# Altium PCB fan_control.PcbDoc
Units mm, origin at the board's own origin, x right, y up, seen from the top; angles counter-clockwise.
Board outline 23.5 x 12 mm, 2 copper layers (Top Layer, Bottom Layer); 21 components, 13 nets, 59 pads, 7 vias.
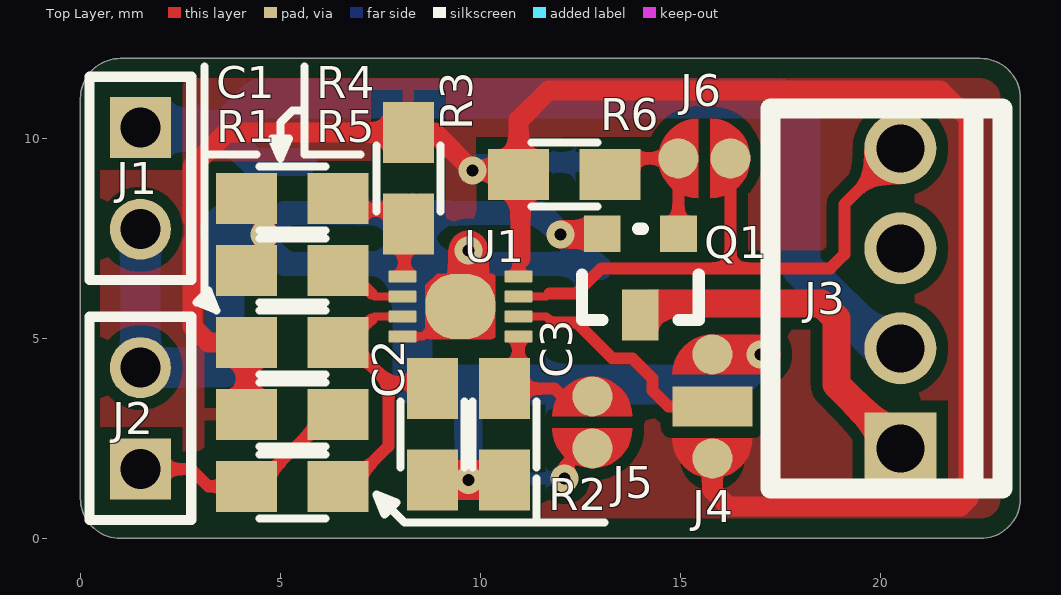
[diagram p0: Top Layer view]
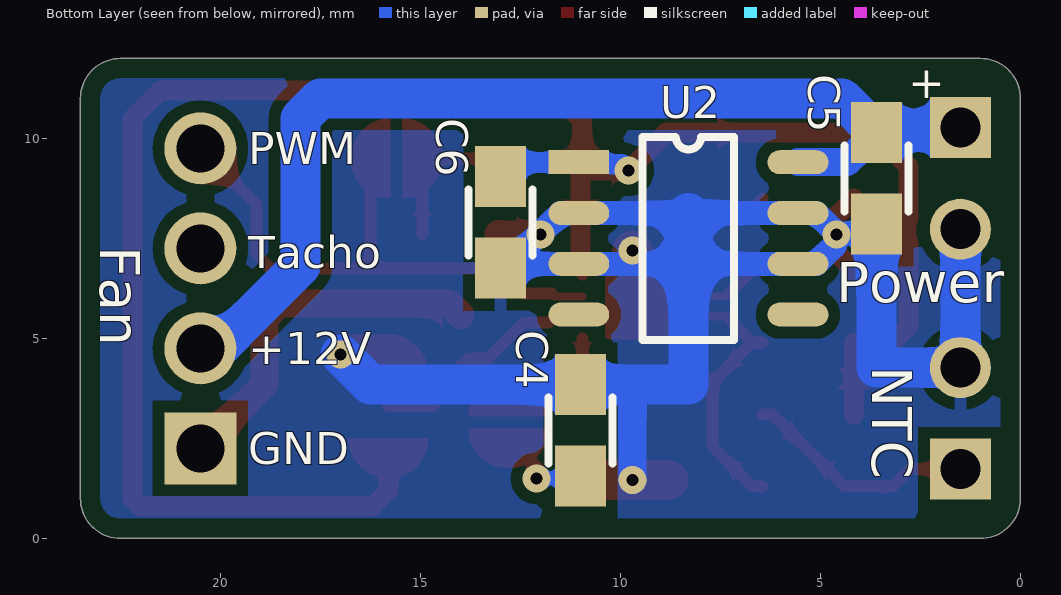
[diagram p1: Bottom Layer view, seen from below]

## Layer stack, top to bottom
Top Solder: solder mask 0.0102, Solder Resist, Dk 3.5
Top Layer: signal copper 0.0356
Dielectric 1: dielectric 0.32, FR-4, Dk 4.8
Bottom Layer: signal copper 0.0356
Bottom Solder: solder mask 0.0102, Solder Resist, Dk 3.5

## Board outline
0,1 0,11 cw(c1,11) 1,12 22.5,12 cw(c22.5,11) 23.5,11 23.5,1 cw(c22.5,1) 22.5,0 1,0 cw(c1,1)

## Design rules (kind name [scope] priority, off if disabled: settings)
Clearance [All] p1: gap=0.3 ignorepadtopadclearanceinfootprint=FALSE except(0: Arc-Hole Track-Hole SMDPad-Hole THPad-Hole Via-Hole Fill-Hole Poly-Hole Region-Hole Text-Hole; 0.2: SMDPad-SMDPad SMDPad-Region; 0.25: Arc-SMDPad Track-SMDPad)
MinimumAnnularRing [All] p1: minimumring=0.2
MinimumSolderMaskSliver [All] p1: minsoldermaskwidth=0.1
PolygonConnect [All] p1: thpad.connectstyle=Relief thpad.reliefconductorwidth=0.3 thpad.reliefentries=4 thpad.polygonreliefangle="90 Angle" thpad.airgapwidth=0.3 smdpad.connectstyle=Relief smdpad.reliefconductorwidth=0.3 smdpad.reliefentries=4 smdpad.polygonreliefangle="90 Angle" smdpad.airgapwidth=0.3 via.connectstyle=Direct via.reliefconductorwidth=0.254 via.reliefentries=4 via.polygonreliefangle="90 Angle" via.airgapwidth=0.254
RoutingVias [All] p1: holewidth=0.3 width=0.7 viastyle="Through Hole" minholewidth=0.3 minwidth=0.6 maxholewidth=5 maxwidth=5
SilkToSilkClearance [All] p1: silktosilkclearance=0.1
SilkToSolderMaskClearance [IsPad] p1: minsilkscreentomaskgap=0.05 clearancetoexposedcopper=TRUE
SolderMaskExpansion [All] p1: expansion=0.05
Width [All] p1: maxlimit=5 minlimit=0.2 preferedwidth=0.3 minimp=50.000000 maximp=50.000000 favimp=50.000000
27 further rules are at their usual default settings.

## Components (designator, comment, footprint, x,y, rotation, side; value= is the part's Value field where it differs from the comment)
C1 "NB" C_0805_S 5.3,4.9 r0 top
C2 "NB" C_0805_S 8.8,2.6 r270 top
C3 "470p" C_0805_S 10.6,2.6 r270 top
C4 "330n" C_0805_S 11,2.7 r90 bottom
C5 "330n" C_0805_S 3.6,9 r270 bottom
C6 "100n" C_0805_S 13,7.9 r270 bottom
J1 "Supply" HEADER_2_RM_2.54 1.5,9 r270 top
J2 "Sensor" HEADER_2_RM_2.54 1.5,3 r90 top
J3 "Fan 4 Lead" CON_1X4_RM2.5_MOLEX_MINI_LATCH 20.5,6 r270 top
J4 "D0" SOLDER_JUMPER_3PIN_0.3MM 15.8,3.3 r90 top
J5 "Freq" Solder_Jumper_2pin_0.3mm 12.8,2.9 r270 top
J6 "PWM" Solder_Jumper_2pin_0.3mm 15.6,9.5 r0 top
Q1 "PMV60ENEA" SOT-23 14,6.6 r180 top
R1 "8.2k" R_0805_S 5.3,3.1 r0 top
R2 "0" R_0805_S 5.3,1.3 r0 top
R3 "NB" R_0805_S 8.2,9 r90 top
R4 "0" R_0805_S 5.3,8.5 r0 top
R5 "6.2k" R_0805_S 5.3,6.7 r0 top
R6 "10k" R_0805_S 12.1,9.1 r180 top
U1 "MAX31740ATA+" "TDFN-8 0.5mm" 9.5,5.8 r0 top
U2 "L78L05ABD13TR" SOIC8 8.3,7.5 r180 bottom

## Footprints (in the part's own frame and the unit in brackets; to place one, negate y for a bottom-side part, rotate by r counter-clockwise, add the part's x,y. Pads: shape width x height; smd on the part's side, far side on the other; paste and mask are expansions set on the pad)
C_0805_S [mil]
  rect 60x50 smd: 1(-45,0) 2(45,0)
  silkscreen extent -32,-31 32,31, body extent -40,-25 40,25, height 51
CON_1X4_RM2.5_MOLEX_MINI_LATCH [mm] "Molex Mini Latch 2.5 Header with lock"
  rect 1.8x1.8 hole 1.2: 1(3.75,0)
  round 1.8 hole 1.2: 2(1.25,0) 3(-1.25,0) 4(-3.75,0)
  silkscreen extent -4.75,-3.25 4.75,2.55, body extent -5.23,-3.25 4.75,2.55, height 11.55
HEADER_2_RM_2.54 [mil] "Header 2 Pin 2.54mm"
  rect 60x60 hole 39.37: 1(-50,0)
  round 60 hole 39.37: 2(50,0)
  silkscreen extent -100,-50 100,50, body extent -100,-50 100,50, height 394
R_0805_S [mil]
  rect 60x50 smd: 1(-45,0) 2(45,0)
  silkscreen extent -32,-31 32,31, body extent -40,-26 40,26, height 49
SOIC8 [mm]
  rect 1.52x0.6 smd: 1(-2.74,1.905)
  oval 1.52x0.6 smd: 2(-2.74,0.635) 3(-2.74,-0.635) 4(-2.74,-1.905) 5(2.74,-1.905) 6(2.74,-0.635) 7(2.74,0.635) 8(2.74,1.905)
  silkscreen extent -1.15,-2.54 1.15,2.54, body extent -3,-2.45 3,2.45, height 1.7
Solder_Jumper_2pin_0.3mm [mm] "Solder jumper with two pins with a spacing of 0.3mm"
  round 1 smd: 1(-0.65,0) 2(0.65,0)
  Top Layer region: 0.15,-1 0.533,-0.924 0.857,-0.707 1.074,-0.383 1.15,0 1.15,0 1.074,0.383 0.857,0.707 0.533,0.924 0.15,1 0.15,1
  Top Layer region: -0.15,1 -0.533,0.924 -0.857,0.707 -1.074,0.383 -1.15,0 -1.15,0 -1.074,-0.383 -0.857,-0.707 -0.533,-0.924 -0.15,-1 -0.15,-1
SOLDER_JUMPER_3PIN_0.3MM [mm] "Solder jumper with three pins with a spacing of 0.3mm"
  round 1 smd: 1(-1.3,0) 3(1.3,0)
  rrect1% 1x2 smd: 2(0,0)
  Top Layer region: -0.8,1 -1.183,0.924 -1.507,0.707 -1.724,0.383 -1.8,0 -1.8,0 -1.724,-0.383 -1.507,-0.707 -1.183,-0.924 -0.8,-1 -0.8,-1
  Top Layer region: 0.8,-1 1.183,-0.924 1.507,-0.707 1.724,-0.383 1.8,0 1.8,0 1.724,0.383 1.507,0.707 1.183,0.924 0.8,1 0.8,1
SOT-23 [mil]
  rect 36x36 smd: 1(-37.5,-40) 2(37.5,-40)
  rect 36x50 smd: 3(0,40)
  silkscreen extent -58,-45 58,45, body extent -57,-47 57,47, height 51
"TDFN-8 0.5mm" [mm] "TDFN, 8 Pin, 0.5mm Spacing"
  rrect20% 0.7x0.3 smd: 1(-1.45,0.75) 2(-1.45,0.25) 3(-1.45,-0.25) 4(-1.45,-0.75) 5(1.45,-0.75) 6(1.45,-0.25) 7(1.45,0.25) 8(1.45,0.75)
  rrect90% 1.75x1.63 smd: 9(0,0)
  Top Layer region: -0.585,0.815 -0.875,0.525 -0.875,-0.725 -0.868,-0.759 -0.849,-0.789 -0.819,-0.808 -0.785,-0.815 -0.785,-0.815 0.785,-0.815 0.819,-0.808 0.849,-0.789 0.868,-0.759 0.875,-0.725 0.875,-0.725 0.875,0.725 0.868,0.759 0.849,0.789 0.819,0.808 0.785,0.815 0.785,0.815
  body extent -1.5,-1 1.5,1, height 0.75

## Part data
C1 C2 C3 C4 C5 C6: library part C
J1 J2: library part CON2
J3: library part CON4
J4: library part SolderJumper_3
J5 J6: library part SolderJumper_2
Q1: library part "MOSFET N"
R1 R2 R3 R4 R5 R6: library part R, "Normaler Widerstand"
U1: "Ultra-Simple Fan-Speed Controller"
U2: "Positive voltage regulator 5V, SO8"

## Via types
v1: diameter 0.7, hole 0.3, Top Layer to Bottom Layer, tented both sides, 7 vias

## Nets (pads, with @x,y where several pads share a name; then routed paths per layer and width w, separated by ;. In a path a pad name is that pad's centre, name@x,y a point inside that pad or via, vN(x,y) a via of type N, cw(c..) or ccw(c..) an arc to the next point about the centre after c; other vN are vias at no path point)
+5V: C1.1 C6.1 J4.1 R1.1 R3.2 R6.2 U1.8 U2.1 | length 52.3
  Top Layer w0.3: U1.8@10.95,6.6 10.95,6.95 11,7
  Top Layer w0.4: 2.8,7.4 2.8,8
  Top Layer w0.5: 2.8,7.4 2.8,5.3 3.2,4.9 C1.1 R1.1 ; 2.8,8 2.8,9.3 3.643,10.143 R3.2 8.857,10.143 v1(9.8,9.2) 10.857,9.2 R6.2 ; 11,7 11,9.057 R6.2 ; J4.1 15.8,1.2 16.2,0.8 22,0.8 22.2,1 22.2,10.5 21.5,11.2 11.7,11.2 10.957,10.457 R6.2
  Bottom Layer w0.5: v1(9.8,9.2) 9.955,9.355 10.99,9.355 U2.1 ; U2.1@11.1,9.405 12.638,9.405 C6.1
+12V: C5.1 J1.1 J3.2 U2.8 | length 26.4
  Bottom Layer w0.7: C5.1 4.338,9.405 U2.8
  Bottom Layer w1: J1.1 1.563,10.206 3.537,10.206 C5.1 4.457,11 17.5,11 18,10.5 18,6.807 20.057,4.75 J3.2
D0: J4.2 U1.6 | length 6
  Top Layer w0.2: U1.6 11.65,5.55 11.8,5.4
  Top Layer w0.3: 11.8,5.4 12.4,5.4 13.3,4.5 13.8,4.5 14.3,4 14.3,3.7 14.7,3.3 J4.2
Dmin: R3.1 R4.2 U1.1 | length 3.7
  Top Layer w0.3: R4.2 R4.2@6.743,8.2 ; R4.2@6.543,8.2 7.957,8.2 8.357,7.8 8.1,7.543 U1.1@8.1,6.6
Freq: C3.1 J5.1 U1.5 | length 3.7
  Top Layer w0.3: U1.5@10.95,5 10.95,4.093 C3.1 11.857,3.743 12.05,3.55 J5.1
GND: C2.2 C3.2 C4.2 C5.2 C6.2 J1.2 J2.2 J4.3 Q1.2 R4.1 R5.1 U1.4 U1.9 U2.2 U2.3 U2.6 U2.7 | length 53.2
  Top Layer w0.2: U1.4 8.565,5.05 9.315,5.8 U1.9
  Top Layer w0.5: R5.1 4.6,7.143 v1(4.6,7.6) 4.6,8.057 R4.1
  Top Layer w0.7: v1(12,7.6) 13.032,7.6 Q1.2
  Top Layer w1: C2.2 v1(9.7,1.457) C3.2 ; U1.9 9.7,6 v1(9.7,7.2) ; J4.3 v1(17,4.6)
  Bottom Layer w0.6: C5.2 3.838,7.619 4.581,7.619 v1(4.6,7.6) ; C6.2 12.892,6.865 C6.2@12.77,6.865 ; v1(4.6,7.6) 4.619,7.619 4.619,7.654 5.1,8.135 U2.7 8.3,8.135 U2.2 11.5,8.135 C6.2@12.77,6.865 ; v1(4.6,7.6) 4.619,7.581 4.619,7.346 5.1,6.865 U2.6 8.3,6.865 U2.3 C6.2@12.77,6.865
  Bottom Layer w0.7: v1(9.7,1.457) 9.7,3.843
  Bottom Layer w1: J1.2 J2.2 3.6,4.27 C5.2 ; 8.3,8.135 8.3,6.865 8.3,3.843 9.7,3.843 C4.2 16.243,3.843 v1(17,4.6)
NetC4_1: C4.1 J5.2 | length 2.3
  Top Layer w0.3: v1(12.1,1.5) 12.1,1.8 12.55,2.25 J5.2
  Bottom Layer w0.3: C4.1 11.057,1.5 v1(12.1,1.5)
NetJ6_1: J6.1 Q1.1 R6.1 | length 3.8
  Top Layer w0.3: R6.1 13.643,9.5 J6.1 Q1.1@14.95,7.616
NTC: J2.1 R1.2 R2.1 | length 5.9
  Top Layer w0.3: J2.1 2.77,1.73 3.2,1.3 R2.1 4.4,1.3 6.2,3.1 R1.2
PWM: J3.4 J6.2 U1.7 | length 14.6
  Top Layer w0.2: U1.7 11.65,6.05 11.725,6.125
  Top Layer w0.3: 11.725,6.125 12.4,6.125 13.025,6.75 16.25,6.75 ; J6.2 16.25,6.75 ; J3.4 19.1,8.35 19.1,7.1 18.75,6.75 16.25,6.75
PWM_Pwr: J3.1 Q1.3 | length 9.1
  Top Layer w0.7: Q1.3 14.285,5.869 18.531,5.869 18.9,5.5 18.9,3.85 J3.1
Sense: C1.2 C2.1 R2.2 U1.3 | length 7.7
  Top Layer w0.2: 7.275,5.475 7.35,5.55 U1.3
  Top Layer w0.3: R2.2 6.7,1.3 7.7,2.3 7.7,3.9 ; C1.2 C1.2@6.7,4.9 ; 7.275,5.475 C1.2@6.7,4.9 ; C2.1 8.643,3.9 7.7,3.9 ; C1.2@6.7,4.9 7.7,3.9
Slope: R5.2 U1.2 | length 1.9
  Top Layer w0.2: 7.275,6.125 7.35,6.05 U1.2
  Top Layer w0.3: R5.2 6.7,6.7 7.275,6.125
pads on no net: J3.3 U2.4 U2.5

## Polygon pours and split planes (outlines as drawn)
GND on Bottom Layer (solid, remove dead copper, pour order 6): 0.5,1 ccw(c1,1) 1,0.5 22.5,0.5 ccw(c22.5,1) 23,1 23,11 ccw(c22.5,11) 22.5,11.5 1,11.5 ccw(c1,11) 0.5,11
+5V on Top Layer (solid, remove dead copper, pour order 4): 0.5,1 ccw(c1,1) 1,0.5 22.5,0.5 ccw(c22.5,1) 23,1 23,11 ccw(c22.5,11) 22.5,11.5 1,11.5 ccw(c1,11) 0.5,11

## Silkscreen, mask and mechanical layers (free items; w line width, h text height)
Top Overlay:
  lines w0.2: 3.1,11.8 3.1,9.6 ; 4.4,9.6 3.1,9.6 ; 5.6,10.7 5.3,10.7 5,10.4 5,9.5 ; 5.6,11.8 5.6,9.6 7,9.6 ; 11.4,0.4 11.4,1.5 ; 13.1,0.4 8.1,0.4 7.4,1.1 ; 3.1,9.6 3.1,6 3.4,5.7 ; 3.4,5.7 3.2,6.2 2.9,5.9 3.4,5.7 ; 5,9.5 5.212,9.995 4.788,9.995 5,9.5 ; 7.4,1.1 7.9,0.9 7.6,0.6 7.4,1.1
Bottom Overlay:
  text "+" at 2.8,11 h0.8
  text "PWM" at 19.3,9.35 h0.8
  text "Fan" at 23,7.3 h1 r90
  text "Tacho" at 19.3,6.75 h0.8
  text "Power" at 4.6,5.9 h1
  text "+12V" at 19.3,4.35 h0.8
  text "NTC" at 3.7,4.3 h1 r90
  text "GND" at 19.3,1.85 h0.8
Mechanical 1:
  the board outline again, w0.2